# Altium PCB 5V_Regulator.PcbDoc
Units mil, origin at the board's own origin, x right, y up, seen from the top; angles counter-clockwise.
Board outline 2500 x 670 mil, 2 copper layers (Top Layer, Bottom Layer); 8 components, 4 nets, 17 pads, 0 vias.
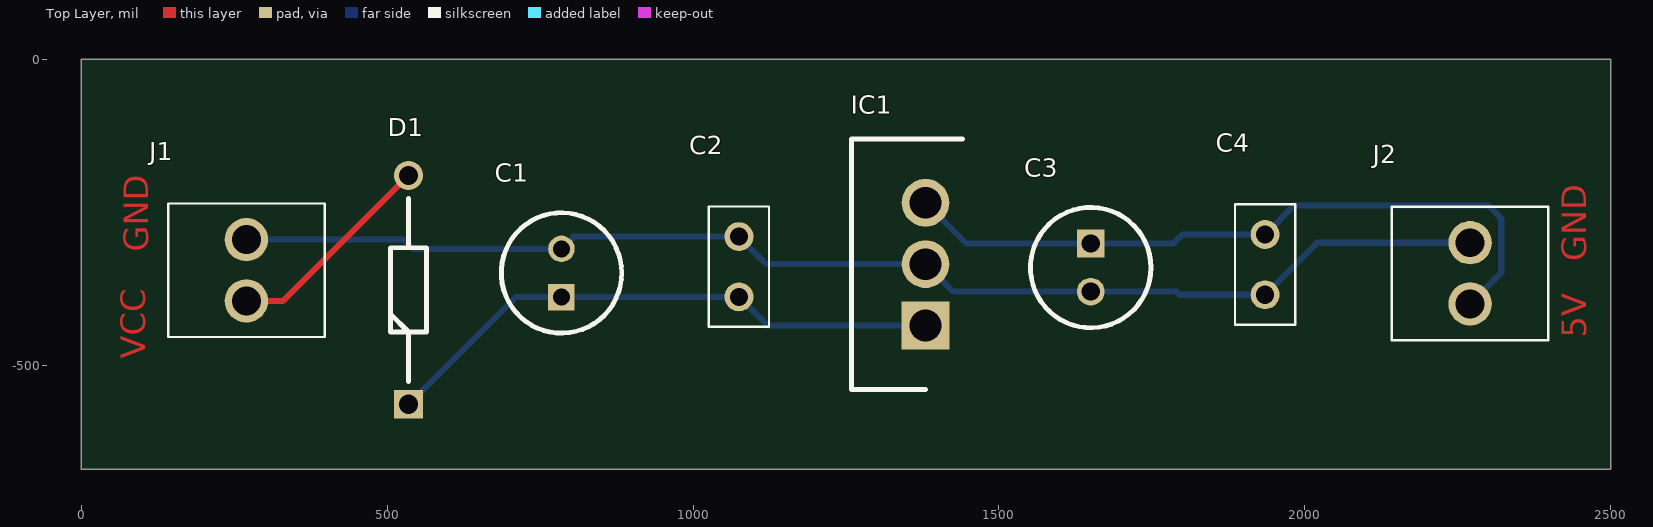
[diagram p0: Top Layer view]
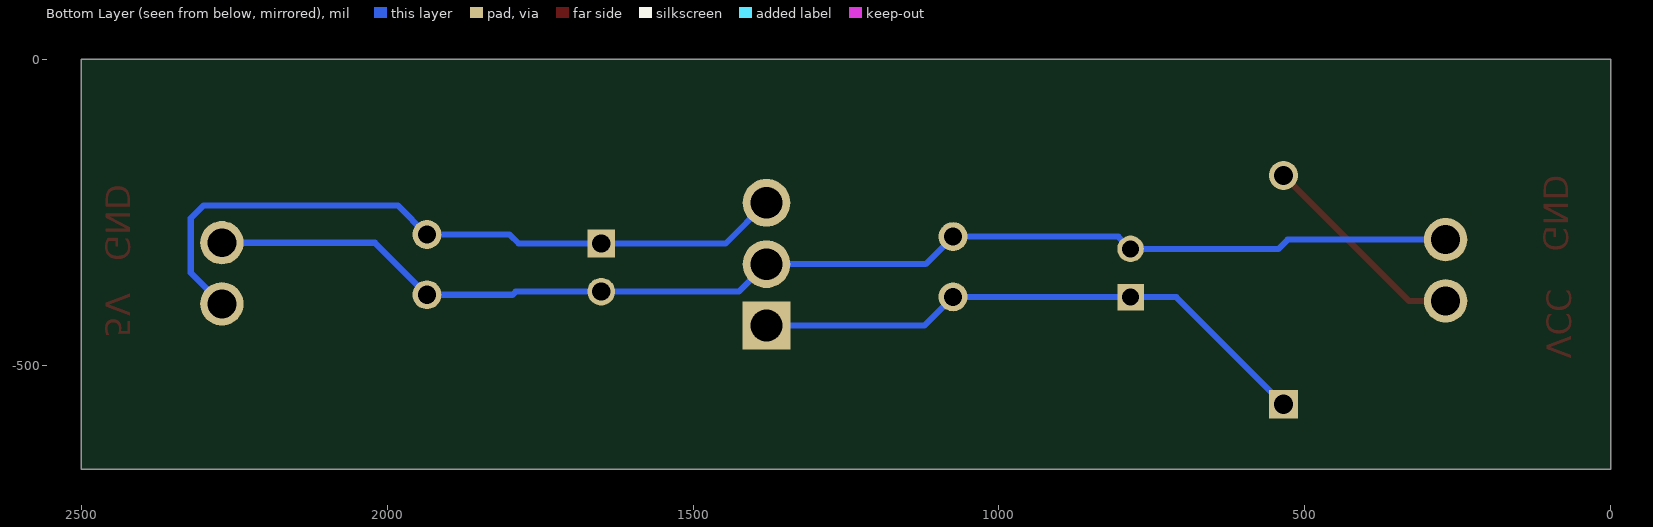
[diagram p1: Bottom Layer view, seen from below]
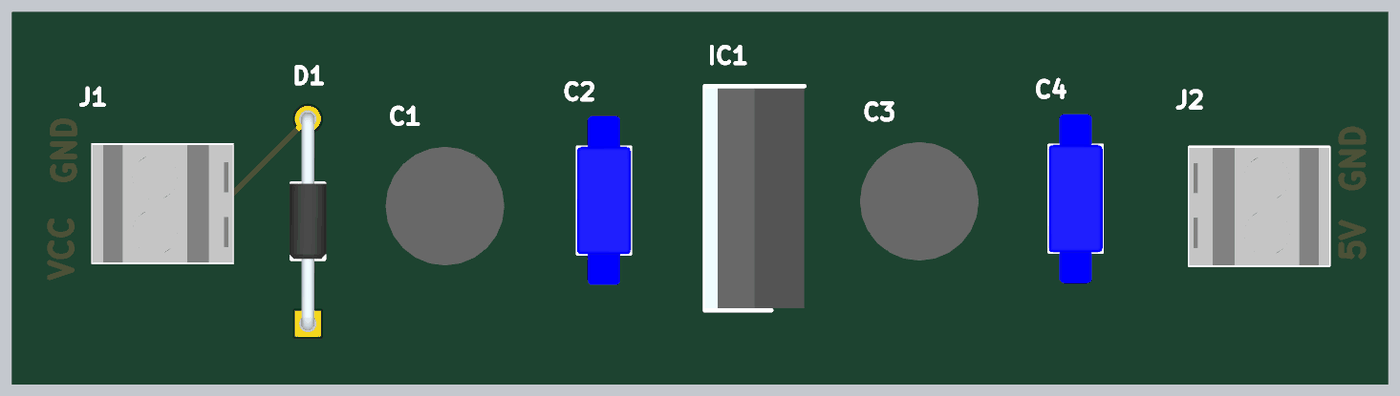
[diagram p2: 3D render of the assembled board from above, using the file's embedded part models]

## Layer stack, top to bottom
Top Solder: solder mask 0.4, Solder Resist, Dk 3.5
Top Layer: signal copper 1.4
Dielectric 1: dielectric 12.6, FR-4, Dk 4.8
Bottom Layer: signal copper 1.4
Bottom Solder: solder mask 0.4, Solder Resist, Dk 3.5

## Board outline
0,-670 0,0 2500,0 2500,-670

## Design rules (kind name [scope] priority, off if disabled: settings)
Clearance [All] p1: gap=10 ignorepadtopadclearanceinfootprint=FALSE except(0: Arc-Hole Track-Hole SMDPad-Hole THPad-Hole Via-Hole Fill-Hole Poly-Hole Region-Hole Text-Hole)
PolygonConnect [All] p1: connectstyle=Relief reliefconductorwidth=10 reliefentries=4 polygonreliefangle="90 Angle" airgapwidth=10
RoutingVias [All] p1: holewidth=28 width=50 viastyle="Through Hole" minholewidth=28 minwidth=50 maxholewidth=28 maxwidth=50
SilkToSolderMaskClearance [IsPad] p1: minsilkscreentomaskgap=5 clearancetoexposedcopper=TRUE
SolderMaskExpansion [All] p1: expansion=4
Width [All] p1: maxlimit=10 minlimit=10 preferedwidth=10
29 further rules are at their usual default settings.

## Components (designator, comment, footprint, x,y, rotation, side; value= is the part's Value field where it differs from the comment)
C1 "0.22uF" CAPPRD200W52D500H1250 785,-388.74 r90 top
C2 "0.1uF" RDE5C1H100J0P1H03B 1075,-388.43 r90 top
C3 "10uF" CAPPRD200W55D500H1250 1650,-301.26 r270 top
C4 "0.1uF" RDE5C1H100J0P1H03B 1935,-286.57 r270 top
D1 "SD103A-TR" DIOAD950W60L350D150 535,-564.02 r90 top
IC1 "L7805CV" TO255P460X1020X2008-3P 1380,-435.39 r90 top
J1 "1546215-2" 15462152 270,-295 r270 top
J2 "1546215-2" 15462152 2270,-400 r90 top

## Footprints (in the part's own frame and the unit in brackets; to place one, negate y for a bottom-side part, rotate by r counter-clockwise, add the part's x,y. Pads: shape width x height; smd on the part's side, far side on the other; paste and mask are expansions set on the pad)
15462152 [mm]
  round 1.8 hole 1.2: 1(0,0) 2(2.54,0)
  silkscreen extent -1.5,-3.25 4.04,3.25, body extent -1.46,-3.25 4,3.25, height 9.91
CAPPRD200W52D500H1250 [mm]
  rect 1.1x1.1 hole 0.7: 1(0,0)
  round 1.1 hole 0.7: 2(2,0)
  silkscreen extent -1.5,-2.5 3.5,2.5, body extent -1.75,-2.75 3.75,2.75, height 12.5
CAPPRD200W55D500H1250 [mm]
  rect 1.15x1.15 hole 0.75: 1(0,0)
  round 1.15 hole 0.75: 2(2,0)
  silkscreen extent -1.5,-2.5 3.5,2.5, body extent -1.75,-2.75 3.75,2.75, height 12.5
DIOAD950W60L350D150 [mm]
  rect 1.2x1.2 hole 0.8: 1(0,0)
  round 1.2 hole 0.8: 2(9.5,0)
  silkscreen extent 0.95,-0.75 8.55,0.75, body extent -0.3,-0.85 9.8,0.85, height 1.69
RDE5C1H100J0P1H03B [mm]
  round 1.2 hole 0.75: 1(0,0) 2(2.5,0)
  silkscreen extent -1.25,-1.25 3.75,1.25, body extent -2.67,-1.25 5.17,1.25, height 6.75
TO255P460X1020X2008-3P [mm]
  rect 1.98x1.98 hole 1.32: 1(0,0)
  round 1.98 hole 1.32: 2(2.55,0) 3(5.1,0)
  silkscreen extent -2.65,-1.53 7.75,3.07, body extent -2.55,-1.53 7.65,3.07, height 19.21

## Part data
C1: library part 860010772002, "Capacitor Polarised", Manufacturer_Name="Wurth Elektronik", Mouser Part Number=710-860010772002, Datasheet Link=https://componentsearchengine.com/Datasheets/1/860010772002.pdf, Height=12.5mm, Manufacturer_Part_Number=860010772002, Mouser Price/Stock=https://www.mouser.co.uk/ProductDetail/Wurth-Elektronik/860010772002?qs=0KOYDY2FL2%2FXueoM4QQtRg%3D%3D
C2 C4: library part RDER71E104K0P1H03B, "Capacitor", Manufacturer_Name="Murata Electronics", Mouser Part Number=81-RDER71E104K0P1H3B, Arrow Part Number=RDER71E104K0P1H03B, Arrow Price/Stock=https://www.arrow.com/en/products/rder71e104k0p1h03b/murata-manufacturing?region=nac, Datasheet Link=https://psearch.en.murata.com/capacitor/product/RDER71E104K0P1H03B.html, Height=6mm, Manufacturer_Part_Number=RDER71E104K0P1H03B, Mouser Price/Stock=https://www.mouser.co.uk/ProductDetail/Murata-Electronics/RDER71E104K0P1H03B?qs=hNud%2FORuBR1RYUkyJwpo2Q%3D%3D
C3: library part EEU-FR1H100, "Capacitor Polarised", Manufacturer_Name=Panasonic, Mouser Part Number=667-EEU-FR1H100, Datasheet Link=http://industrial.panasonic.com/cdbs/www-data/pdf/RDF0000/ABA0000C1259.pdf, Height=12.5mm, Manufacturer_Part_Number=EEU-FR1H100, Mouser Price/Stock=https://www.mouser.co.uk/ProductDetail/Panasonic/EEU-FR1H100?qs=tfZGHB2PWd1NAbdNSgjToQ%3D%3D
D1: "Schottky Diode", Manufacturer_Name=Vishay, Mouser Part Number=625-SD103A, Arrow Part Number=SD103A-TR, Arrow Price/Stock=https://www.arrow.com/en/products/sd103a-tr/vishay?region=nac, Datasheet Link=https://componentsearchengine.com/Datasheets/5/SD103A-TR.pdf, Manufacturer_Part_Number=SD103A-TR, Mouser Price/Stock=https://www.mouser.co.uk/ProductDetail/Vishay-Semiconductors/SD103A-TR?qs=RwahMLkpD2urFD%2FzZdGOBw%3D%3D
IC1: "Integrated Circuit", Manufacturer_Name=STMicroelectronics, Mouser Part Number=511-L7805CV, Arrow Part Number=L7805CV, Arrow Price/Stock=https://www.arrow.com/en/products/l7805cv/stmicroelectronics?region=europe, Datasheet Link=http://www.st.com/web/en/resource/technical/document/datasheet/CD00000444.pdf, Height=4.6mm, Manufacturer_Part_Number=L7805CV, Mouser Price/Stock=https://www.mouser.co.uk/ProductDetail/STMicroelectronics/L7805CV?qs=9NrABl3fj%2FqplZAHiYUxWg%3D%3D
J1 J2: "Connector", Manufacturer_Name="TE Connectivity", Mouser Part Number=571-1546215-2, Arrow Part Number=1546215-2, Arrow Price/Stock=https://www.arrow.com/en/products/1546215-2/te-connectivity?region=nac, Datasheet Link=https://www.te.com/commerce/DocumentDelivery/DDEController?Action=srchrtrv&DocNm=1546215&DocType=Customer+Drawing&DocLang=English, Height=10.3mm, Manufacturer_Part_Number=1546215-2, Mouser Price/Stock=https://www.mouser.co.uk/ProductDetail/TE-Connectivity/1546215-2?qs=Lxq28tKK6BPmJFoAOY7Ljw%3D%3D

## Nets (pads, with @x,y where several pads share a name; then routed paths per layer and width w, separated by ;. In a path a pad name is that pad's centre, name@x,y a point inside that pad or via, vN(x,y) a via of type N, cw(c..) or ccw(c..) an arc to the next point about the centre after c; other vN are vias at no path point)
5V: C3.1 C4.1 IC1.3 J2.1 | length 1164.2
  Bottom Layer w10: IC1.3 1446.65,-301.26 C3.1 1785,-301.26 1799.69,-286.57 C4.1 1982.57,-239 2300,-239 2321,-260 2321,-349 J2.1
GND: C1.2 C2.2 C3.2 C4.2 IC1.2 J1.1 J2.2 | length 2089.1
  Bottom Layer w10: J1.1 528,-295 543,-310 C1.2 805,-290 C2.2 1120,-335 IC1.2 1425,-380 C3.2 1790,-380 1795,-385 C4.2 2020,-300 J2.2
NetC1_1: C1.1 C2.1 D1.1 IC1.1 | length 937.2
  Bottom Layer w10: D1.1 710.28,-388.74 C1.1 929,-388.74 929.31,-388.43 C2.1 1121.97,-435.39 IC1.1
VCC: D1.2 J1.2 | length 349.9
  Top Layer w10: J1.2 330,-395 D1.2

## Other copper
Top Layer:
  text "GND" at 110,-315 h40 r90
  text "GND" at 2460,-330 h40 r90
  text "5V" at 2460,-455 h40 r90
  text "VCC" at 105,-490 h40 r90

## Silkscreen, mask and mechanical layers (free items; w line width, h text height)
CUTOUT (Mech17):
  the board outline again, w10